# EAGLE board LDBiasDriver (EAGLE 7.7.0)
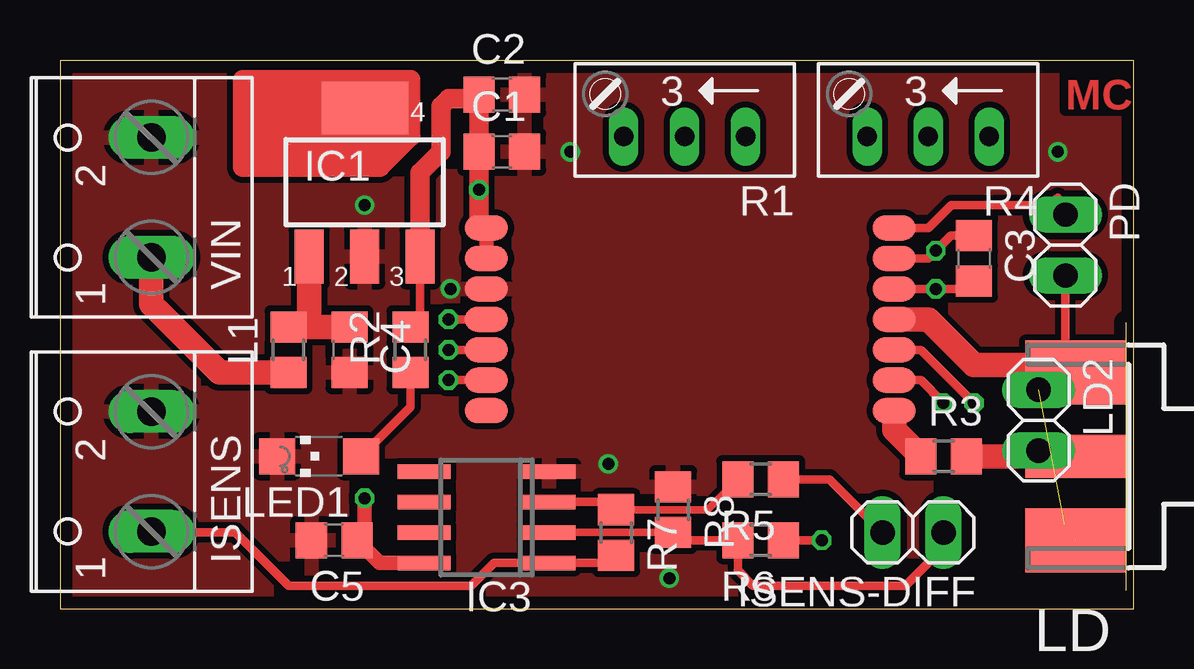
[diagram p0: board, top side]
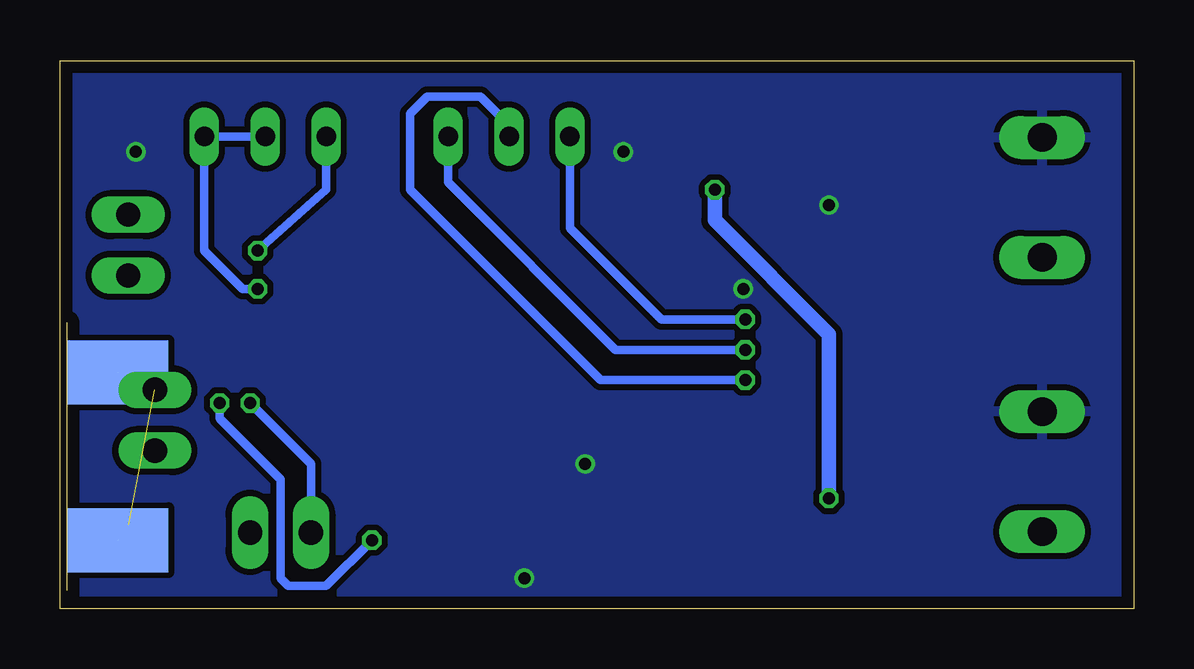
[diagram p1: board, bottom side, seen from below]

Size 44.76 x 22.85 mm. Coordinates in mm from the lower left corner, seen from the top.
Outline: 0,0 44.76,0 44.76,22.85 0,22.85 0,0
Copper layers (1*16): Top 0.035mm / dielectric 1.6mm / Bottom 0.035mm
Design rules "Elecrow_2-layer_PCB_eagle_rule *": minimum track width 6mil, minimum drill 12mil, track to track 10mil, track to pad 10mil, pad to pad 10mil, via to via 10mil, smd to smd 10mil, copper to edge 20mil, drill to drill 10mil, minimum pad ring 6mil, minimum via ring 6mil, stop-mask expansion 0mil, vias tented up to drill 100mil, thermal gap 10mil

## Footprints (pad centres in the part's own frame; a part is rotated, then mirrored left to right if it is on the bottom)
C0805 = smd 1.3 x 1.5: 1 -0.95,0; 2 0.95,0
SOT223 = smd 1.219 x 2.235: 1 -2.311,-3.099; 2 0,-3.099; 3 2.311,-3.099 | smd 3.6 x 2.2: 4 0,3.099
MLD203 = smd 1.8 x 1.05: P$1 0,0; P$2 0,-1.27; P$3 0,-2.54; P$4 0,-3.81; P$5 0,-5.08; P$6 0,-6.35; P$7 0,-7.62; P$8 17,0; P$9 17,-1.27; P$10 17,-2.54; P$11 17,-3.81; P$12 17,-5.08; P$13 17,-6.35; P$14 17,-7.62
SO08 = smd 0.6 x 2.2: 1 -1.905,-2.6; 2 -0.635,-2.6; 3 0.635,-2.6; 4 1.905,-2.6; 5 1.905,2.6; 6 0.635,2.6; 7 -0.635,2.6; 8 -1.905,2.6
W237-102 = drill 1.194 long: 1 -2.5,-1.27; 2 2.5,-1.27
1X02 = drill 1.016 long: 1 -1.27,0; 2 1.27,0
R0805 = smd 1.3 x 1.5: 1 -0.95,0; 2 0.95,0
J502-ND-142-0711-821/826 = smd 4.191 x 1.778: 1 2.115,0 | smd 4.191 x 2.667: G@1 2.115,3.495; G@2 2.115,-3.495 | smd 4.191 x 2.667 bottom: G@3 2.115,3.495; G@4 2.115,-3.495
CHIPLED_1206 = smd 1.5 x 1.5: A 0,-1.75; C 0,1.75
RJ9W = drill 0.813 long: A 2.54,0.635; E -2.54,0.635; S 0,0.635

## Placement (x,y rotation side)
C1  0.1uF  [C0805]  18.41,19.05 0 top
C2  10uF  [C0805]  18.41,21.43 0 top
C3  100pF  [C0805]  38.1,14.61 270 top
C4  10uF  [C0805]  12.06,10.79 270 top
C5  0.1uF  [C0805]  11.43,2.86 180 top
IC1  MCP1703-5002E/DB  [SOT223]  12.7,17.78 0 top
IC2  MLD203P1  [MLD203]  17.78,15.88 0 top
IC3  LM358D  [SO08]  17.78,3.81 90 top
ISENS  [W237-102]  2.54,5.71 90 top
ISENS-DIFF  [1X02]  35.56,3.17 180 top
L1  Bead  [R0805]  9.53,10.79 90 top
LD  SMA-142-0711-821/826  [J502-ND-142-0711-821/826]  44.45,6.35 180 top
LD2  [1X02]  40.8,7.86 270 top
LED1  [CHIPLED_1206]  10.79,6.35 90 top
PD  [1X02]  41.91,15.16 270 top
R1  10k  [RJ9W]  26.04,20.32 180 top
R2  1k  [R0805]  14.61,10.79 90 top
R3  270  [R0805]  36.83,6.35 0 top
R4  100k  [RJ9W]  36.2,20.32 180 top
R5  1k  [R0805]  29.21,5.4 180 top
R6  1k  [R0805]  29.21,2.86 180 top
R7  100k  [R0805]  23.18,3.17 270 top
R8  100k  [R0805]  25.56,4.13 270 top
VIN  6-12V  [W237-102]  2.54,17.14 90 top

## Library data of the parts
C1-C5 L1 R2 R3 R5-R8 = rcl
IC1 IC3 = linear
IC2 = laser diode
ISENS VIN = con-wago-500; MPN: 237-102; OC_FARNELL: unknown; OC_NEWARK: 70K9898
ISENS-DIFF LD2 PD = pinhead
LD = con-coax; MF: JOHNSON COMPONENTS; MPN: 142-0711-821; OC_FARNELL: 1019328; OC_NEWARK: 16F3627
LED1 = led
R1 R4 = pot

## Nets
+5V: C1.1 C2.1 C5.1 IC1.3 IC2.P$1 IC2.P$2 IC3.8 R2.2
GND: C1.2 C2.2 C4.2 C5.2 IC1.2 IC2.P$3 IC3.4 ISENS.2 LED1.C R8.1 VIN.2
N$2: IC2.P$6 R1.S
N$3: LED1.A R2.1
N$4: IC2.P$5 R1.E
N$5: IC2.P$4 R1.A
N$6: IC2.P$12 R6.1
N$7: IC2.P$13 ISENS-DIFF.2 R5.1
N$8: LD2.2 LD.1 R3.2
N$9: IC2.P$14 R3.1
N$10: IC2.P$11 LD2.1 LD.G@1 LD.G@2 LD.G@3 LD.G@4 PD.2
N$11: IC2.P$8 PD.1
N$12: C3.2 IC2.P$10 R4.E R4.S
N$13: C3.1 IC2.P$9 R4.A
N$14: L1.1 VIN.1
N$15: C4.1 IC1.1 L1.2
N$16: IC3.3 R5.2 R7.1
N$17: IC3.2 ISENS-DIFF.1 R6.2 R8.2
N$18: IC3.1 ISENS.1 R7.2

## Tracks (layer width: path | path; a pad name or v marks a point on that pad's centre or on a via)
+5V  (via drill 0.5)
  Top 0.356: IC1.3 15.01,12.15
  Top 0.61: 15.01,12.15 R2.2 | 12.7,4.12 v12.7,4.6 12.7,3.18 C5.1 13.33,1.91 IC3.8 | IC2.P$1 IC2.P$2
  Top 0.813: IC1.3 15.01,18.19 15.88,19.05 15.88,20.95 16.19,21.27 17.31,21.27 C2.1 C1.1 v17.46,17.46 17.46,16.19 IC2.P$1
  Bottom 0.61: v17.46,17.46 17.46,16.19 12.7,11.43 v12.7,4.6
GND  (via drill 0.5)
  other vias: 41.59,19.05 21.27,19.05 22.86,6.03 25.4,1.27 12.7,16.83 16.27,13.34
  pour Top: -1.27,22.86 44.45,22.86 44.45,0 0,0
  pour Bottom: -1.27,22.86 0,0 44.45,0 44.45,22.86
N$1
  Top 0.813: 13.97,21.59 7.62,21.59 | 7.62,21.59 7.62,18.41 13.34,18.41 14.61,19.68 14.61,22.07 7.62,22.07 7.62,21.59
N$2  (via drill 0.5)
  Top 0.356: IC2.P$6 v16.19,9.53
  Bottom 0.356: v16.19,9.53 22.23,9.53 30.16,17.46 30.16,20.64 29.45,21.35 27.23,21.35 26.04,20.16 R1.S
N$3
  Top 0.356: R2.1 14.61,8.41 LED1.A
N$4  (via drill 0.5)
  Top 0.356: IC2.P$5 v16.19,10.79
  Bottom 0.356: v16.19,10.79 21.59,10.79 28.57,17.78 R1.E
N$5  (via drill 0.5)
  Top 0.356: IC2.P$4 v16.19,12.06
  Bottom 0.356: v16.19,12.06 19.68,12.06 23.5,15.88 R1.A
N$6  (via drill 0.5)
  Top 0.356: IC2.P$12 35.88,10.79 v38.1,8.57 | v31.75,2.86 R6.1
  Bottom 0.356: v38.1,8.57 38.1,7.94 35.56,5.4 35.56,1.27 35.24,0.95 33.66,0.95 v31.75,2.86
N$7  (via drill 0.5)
  Top 0.356: R5.1 32.07,5.4 ISENS-DIFF.2 | IC2.P$13 35.88,9.53 v36.83,8.57
  Bottom 0.356: v36.83,8.57 34.29,6.03 ISENS-DIFF.2
N$8
  Top 0.406: 40.64,6.03 40.64,6.35 | LD2.2 41.73,6.51 LD.1
  Top 1.016: R3.2 40.64,6.35 LD.1
N$9
  Top 1.016: IC2.P$14 34.78,7.45 R3.1
N$10  (3 unrouted)
  Top 0.356: PD.2 41.91,9.76 LD.G@2
  Top 0.406: 41.88,3.49 LD.G@3 | LD2.1 41.88,10.48 LD.G@2 42.04,10.72
  Top 1.016: IC2.P$11 36.2,12.06 38.1,10.16 43.13,10.16 LD.G@2
N$11
  Top 0.356: IC2.P$8 36.2,15.88 37.15,16.83 41.27,16.83 41.59,17.14 PD.1
N$12  (via drill 0.5)
  Top 0.356: 37.78,13.34 v36.51,13.34 IC2.P$10
  Top 0.61: 37.78,13.34 arc-90 C3.2
  Bottom 0.356: v36.51,13.34 37.15,13.34 38.73,14.92 R4.E R4.S
N$13  (via drill 0.5)
  Top 0.356: IC2.P$9 36.2,14.61 v36.51,14.92 37.15,15.55 C3.1
  Bottom 0.356: v36.51,14.92 33.66,17.46 R4.A
N$14
  Top 1.016: VIN.1 3.81,12.7 6.67,9.85 L1.1
N$15
  Top 1.016: L1.2 10.16,11.74 | 10.16,11.74 C4.1 | IC1.1 10.39,11.97 10.16,11.74
N$16
  Top 0.305: R7.1 26.99,4.12 R5.2
  Top 0.356: IC3.3 22.54,4.45 R7.1
N$17
  Top 0.305: IC3.2 R8.2
  Top 0.356: ISENS-DIFF.1 36.83,2.54 35.24,0.95 28.89,0.95 28.26,1.59 R6.2 25.72,2.86
  Top 0.61: R8.2 25.72,2.86
N$18
  Top 0.356: R7.2 22.54,1.91 IC3.1 18.1,1.91 17.14,0.95 9.53,0.95 7.3,3.17 3.85,3.17 ISENS.1
N$19
  Top 0.813: 7.94,20.95 12.06,20.95 11.43,20.32 7.94,20.32 7.94,19.05 13.34,19.05 13.97,19.68 | 13.97,19.68 14.29,19.68 | 13.97,19.68 8.26,19.68

## Text on the board
Top: MC
tStop: MC
bStop: Mitchell A. Cox | v1.1 2016 | LD Bias
tDocu: R3
bDocu: PDA | Power | 6-12V + | GND | LDA | 0.1V/mA +